# Altium PCB TIDA_010057.PcbDoc (part 3 of 9)
Units mil, origin at the board's own origin, x right, y up, seen from the top; angles counter-clockwise.
Board outline 1771.65 x 3543.31 mil, 12 copper layers (Top Layer, GND1, Signal Layer 1, GND2, POWER1, POWER2, GND4, POWER3, GND6, Signal Layer 2, GND7, Bottom Layer), stack 62.79 mil thick; 593 components, 374 nets, 1805 pads, 1029 vias.
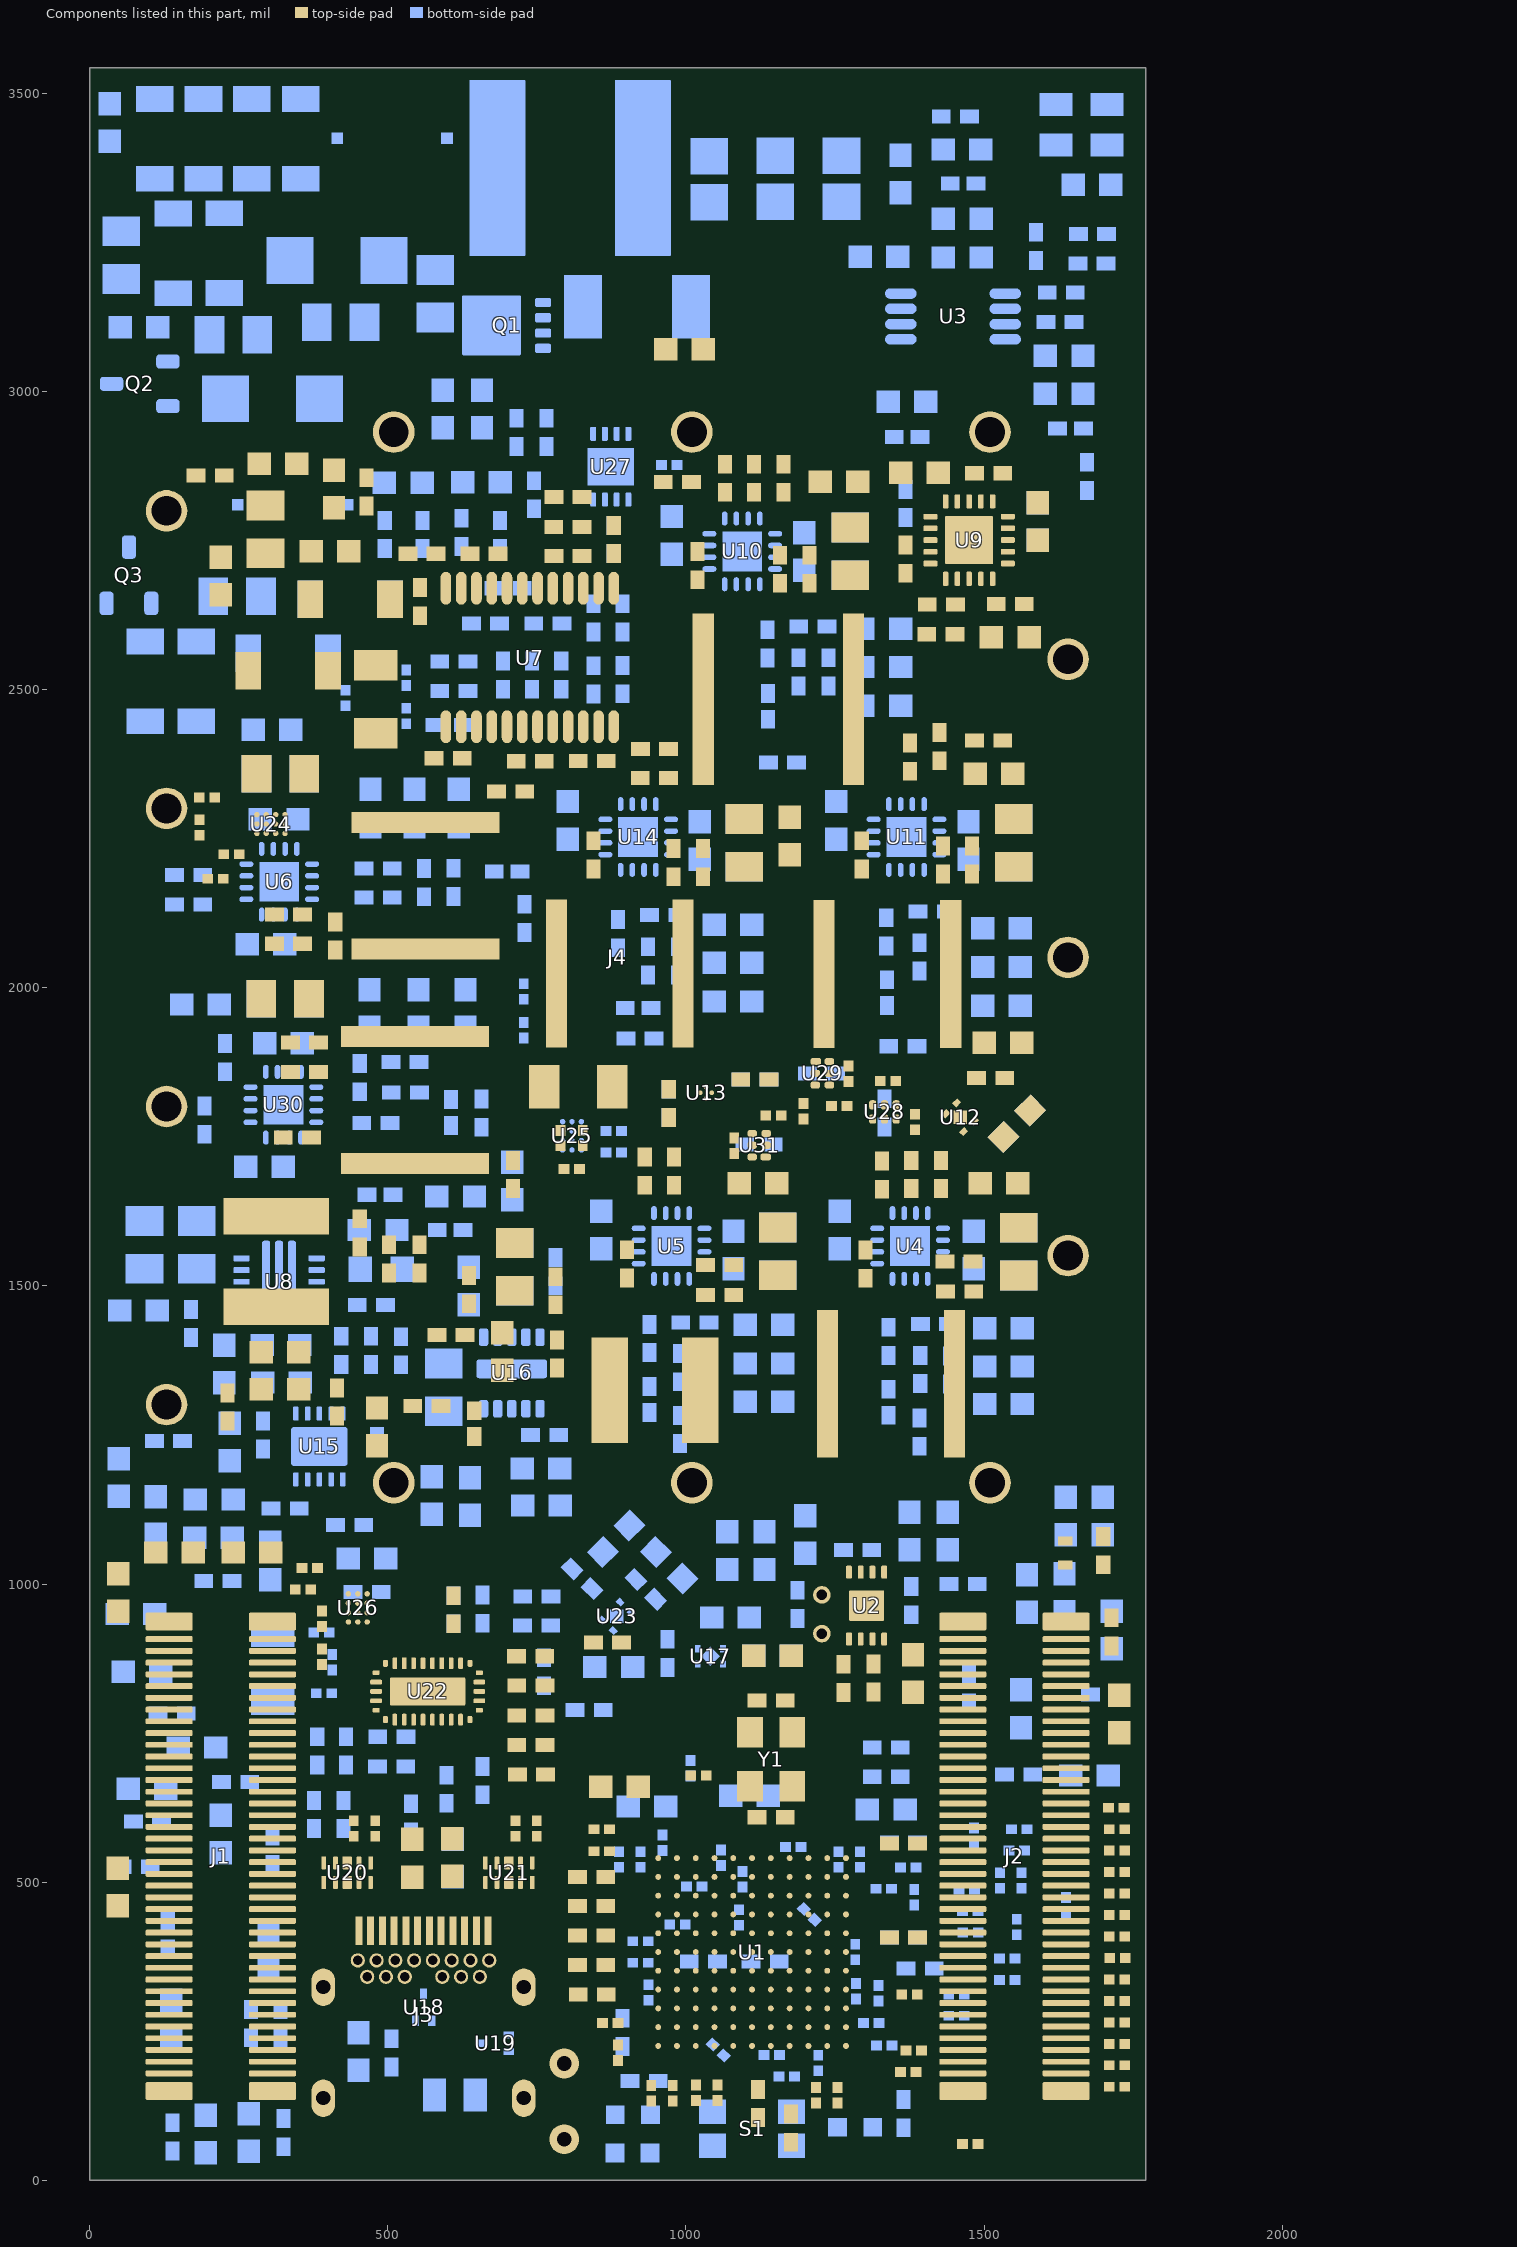
[diagram p12: the components of this part, seen from the top]

## Part data (continued)
C73 C101 C223: "CAP, CERM, 10 µF, 10 V,+/- 20%, X5R, 0402", Cap_Case=0402, Manufacturer="Samsung Electro-Mechanics", Supplier Part Number 1=1276-1450-1-ND, TempCo=X5R, Tolerance_%=20, Value2=10V, ValueDisplayed=10µF, AEC Category=Q200, AEC Qualified=?, Cap_F=0.00001, ComponentLink1Description="Datasheet link", ComponentLink1URL=https://sps06.itg.ti.com/sites/KMS/crossdivteams/altium/docs/ComponentDatasheets/CL05A106MP5NUNC.pdf, CompType=Capacitor, Green_EU RoHS=Passed, Green_EU RoHS-2=Incomplete, Green_Lifecycle=Active, Green_REACh=Passed, LatestRevisionDate=2017-06-22, MountType=SMT, PackageReference=0402, PartNumber=CL05A106MP5NUNC, Polarized=N, Published=2008-06-19, Publisher="Texas Instruments", RoHS=Y, SizeArea_mm2=0.5, SizeAreaWB_mm2=3, SizeX_mm=1, SizeY_mm=0.5, SizeZ_mm=0.6, Supplier 1=Digi-Key, SymbolVersion=2008-07-09, TaMax_C=85, TaMin_C=-55, Technology=Ceramic, U/M=EA, VDC_V=10
C77 C164 C174: "CAP, CERM, 1 µF, 16 V,+/- 10%, X6S, 0402", Cap_Case=0402, Manufacturer=TDK, Supplier Part Number 1=445-9086-1-ND, TempCo=X6S, Tolerance_%=10, Value1="0.011416 ohm", Value2=16V, ValueDisplayed=1µF, AEC Category=Q200, AEC Grade=N/A, AEC Qualified=N, Cap_F=0.000001, ComponentLink1Description="Datasheet link", ComponentLink1URL=https://product.tdk.com/en/search/capacitor/ceramic/mlcc/info?part_no=C1005X6S1C105K050BC, CompType=Capacitor, ESR_Ohm=0.011416, IRMS_A=1.483, LatestRevisionDate=2017-06-22, MountType=SMT, PackageReference=0402, PartNumber=C1005X6S1C105K050BC, Polarized=N, Published=2008-06-19, Publisher="Texas Instruments", RoHS=Y, SizeArea_mm2=0.5, SizeAreaWB_mm2=3, SizeX_mm=1, SizeY_mm=0.5, SizeZ_mm=0.6, Supplier 1=Digi-Key, Supplier 2=Mouser, Supplier Part Number 2=810-C1005X6S1C105K050BC, SymbolVersion=2008-07-09, TaMax_C=105, TaMin_C=-55, Technology=Ceramic, U/M=EA, VDC_V=16
C78: library part CMP-0009745-1, "CAP, CERM, 1000 pF, 16 V, +/- 10%, X7R, 0201", Cap_Case=0201, Manufacturer=MuRata, Supplier Part Number 1=GRM033R71C102KA01D-ND, TempCo=X7R, Tolerance_%=10%, Value1=Unknown, Value2=16V, ValueDisplayed=1000pF, AEC Category=Q200, AEC Qualified=?, Cap_F=1nF, ComponentLink1Description="Datasheet link", ComponentLink1URL=http://search.murata.co.jp/Ceramy/PnsearchViewAction.do?HnOFG=ON&HnNFG=ON&SEL_CNT=50&sLang=en&sKey=GRM033R71C102KA01D&x=9&y=9&search=startwith, CompType=Capacitor, LatestRevisionDate=2017-03-09, MountType=SMT, PackageReference=0201, PartNumber=GRM033R71C102KA01D, Polarized=N, Published=2008-06-19, Publisher="Texas Instruments", RoHS=Y, SizeArea_mm2=0.18, SizeAreaWB_mm2=2.08, SizeX_mm=0.6, SizeY_mm=0.3, SizeZ_mm=0.26, Supplier 1=Digi-Key, Supplier 2=Mouser, Supplier Part Number 2=81-GRM033R71C102KA1D, TaMax_C=125°C, TaMin_C=-55°C, Technology=Ceramic, U/M=EA, VDC_V=16V
C83 C84 C99 C109 C131 C224 C235 C236: "CAP, CERM, 1 µF, 16 V,+/- 10%, X7R, 0603", Cap_Case=0603, Manufacturer="Wurth Elektronik", Supplier Part Number 1=710-885012206052, TempCo=X7R, Tolerance_%=10, Value2=16V, ValueDisplayed=1µF, AEC Category=Q200, AEC Grade=N/A, AEC Qualified=N, Cap_F=0.000001, ComponentLink1Description="Datasheet link", ComponentLink1URL=http://katalog.we-online.de/pbs/datasheet/885012206052.pdf, CompType=Capacitor, Green_EU RoHS=Passed, Green_EU RoHS-2=Incomplete, Green_Lifecycle=Active, Green_REACh=Passed, LatestRevisionDate=2017-06-22, MountType=SMT, PackageReference=0603, PartNumber=885012206052, Polarized=N, Published=2008-06-19, Publisher="Texas Instruments", RoHS=Y, SizeArea_mm2=1.28, SizeAreaWB_mm2=4.68, SizeX_mm=1.6, SizeY_mm=0.8, SizeZ_mm=1, Supplier 1=Mouser, SymbolVersion=2008-07-09, TaMax_C=125, TaMin_C=-55, Technology=Ceramic, U/M=EA, VDC_V=16
C85 C108 C119 C203 C234: "CAP, CERM, 4.7 µF, 10 V,+/- 20%, X5R, 0603", Cap_Case=0603, Manufacturer=MuRata, TempCo=X5R, Tolerance_%=20, Value2=10V, ValueDisplayed=4.7µF, AEC Category=Q200, AEC Grade=N/A, AEC Qualified=N, Cap_F=0.0000047, ComponentLink1Description="Datasheet link", ComponentLink1URL=http://psearch.en.murata.com/capacitor/product/GRM188R61A475MAAJ%23.pdf, CompType=Capacitor, LatestRevisionDate=2017-06-22, MountType=SMT, PackageReference=0603, PartNumber=GRM188R61A475MAAJ, Polarized=N, Published=2008-06-19, Publisher="Texas Instruments", RoHS=Y, SizeArea_mm2=1.28, SizeAreaWB_mm2=4.68, SizeX_mm=1.6, SizeY_mm=0.8, SizeZ_mm=1, SymbolVersion=2008-07-09, TaMax_C=85, TaMin_C=-55, Technology=Ceramic, U/M=EA, VDC_V=10
C100: library part CMP-0006676-2, "CAP, CERM, 1200 pF, 50 V, +/- 10%, X7R, 0402", Cap_Case=0402, Manufacturer=MuRata, Supplier Part Number 1=490-1304-1-ND, TempCo=X7R, Tolerance_%=10%, Value1=Unknown, Value2=50V, ValueDisplayed=1200pF, AEC Category=Q200, AEC Qualified=?, Cap_F=1.2nF, ComponentLink1Description="Datasheet link", ComponentLink1URL=http://search.murata.co.jp/Ceramy/PnsearchViewAction.do?HnOFG=ON&HnNFG=ON&SEL_CNT=50&sLang=en&sKey=GRM155R71H122KA01D&x=9&y=9&search=startwith, CompType=Capacitor, LatestRevisionDate=2017-03-09, MountType=SMT, PackageReference=0402, PartNumber=GRM155R71H122KA01D, Polarized=N, Published=2008-06-19, Publisher="Texas Instruments", RoHS=Y, SizeArea_mm2=0.5, SizeAreaWB_mm2=3, SizeX_mm=1, SizeY_mm=0.5, SizeZ_mm=0.6, Supplier 1=Digi-Key, Supplier 2=Mouser, Supplier Part Number 2=81-GRM15R71H122KA01D, TaMax_C=125°C, TaMin_C=-55°C, Technology=Ceramic, U/M=EA, VDC_V=50V
C107: library part CMP-0006389-2, "CAP, CERM, 470 pF, 25 V, +/- 5%, C0G/NP0, 0402", Cap_Case=0402, Manufacturer=MuRata, Supplier Part Number 1=GRM1555C1E471JA01D-ND, TempCo=C0G/NP0, Tolerance_%=5%, Value1=Unknown, Value2=25V, ValueDisplayed=470pF, AEC Category=Q200, AEC Qualified=?, Cap_F=470pF, ComponentLink1Description="Datasheet link", ComponentLink1URL=http://search.murata.co.jp/Ceramy/PnsearchViewAction.do?HnOFG=ON&HnNFG=ON&SEL_CNT=50&sLang=en&sKey=GRM1555C1E471JA01D&x=9&y=9&search=startwith, CompType=Capacitor, LatestRevisionDate=2017-03-09, MountType=SMT, PackageReference=0402, PartNumber=GRM1555C1E471JA01D, Polarized=N, Published=2008-06-19, Publisher="Texas Instruments", RoHS=Y, SizeArea_mm2=0.5, SizeAreaWB_mm2=3, SizeX_mm=1, SizeY_mm=0.5, SizeZ_mm=0.6, Supplier 1=Digi-Key, Supplier 2=Mouser, Supplier Part Number 2=81-GRM1555C1E471JA1D, TaMax_C=125°C, TaMin_C=-55°C, Technology=Ceramic, U/M=EA, VDC_V=25V
C115: library part CMP-0085848-1, "CAP, CERM, 1 µF, 25 V,+/- 10%, X5R, 0402", Cap_Case=0402, Manufacturer="Samsung Electro-Mechanics", TempCo=X5R, Tolerance_%=10%, Value2=25V, ValueDisplayed=1µF, AEC Category=Q200, AEC Grade=N/A, AEC Qualified=N, Cap_F=1µF, ComponentLink1Description="Datasheet link", ComponentLink1URL=http://www.samsungsem.com/kr/support/product-search/mlcc/__icsFiles/afieldfile/2018/06/19/CL05A105KA5NQNC.pdf, CompType=Capacitor, MountType=SMT, PackageReference=0402, PartNumber=CL05A105KA5NQNC, Polarized=N, RoHS=Y, SizeArea_mm2=0.5, SizeAreaWB_mm2=3, SizeX_mm=1, SizeY_mm=0.5, SizeZ_mm=0.6, TaMax_C=85°C, TaMin_C=-55°C, Technology=Ceramic, U/M=EA, VDC_V=25V
C120 C121 C178 C181 C191 C195 C207: "CAP, CERM, 10 µF, 16 V,+/- 20%, X5R, 0603", Cap_Case=0603, Manufacturer=MuRata, Supplier Part Number 1=GRM188R61C106MAALD-ND, TempCo=X5R, Tolerance_%=20, Value2=16V, ValueDisplayed=10µF, AEC Category=Q200, AEC Qualified=?, Cap_F=0.00001, ComponentLink1Description="Datasheet link", ComponentLink1URL=http://www.murata.com/~/media/webrenewal/support/library/catalog/products/capacitor/mlcc/c02e.ashx, CompType=Capacitor, Green_EU RoHS=Passed, Green_EU RoHS-2=Incomplete, Green_Lifecycle=Active, Green_REACh=Passed, LatestRevisionDate=2017-06-22, MountType=SMT, PackageReference=0603, PartNumber=GRM188R61C106MAALD, Polarized=N, Published=2008-06-19, Publisher="Texas Instruments", RoHS=Y, SizeArea_mm2=1.28, SizeAreaWB_mm2=4.68, SizeX_mm=1.6, SizeY_mm=0.8, SizeZ_mm=1, Supplier 1=Digi-Key, Supplier 2=Mouser, Supplier Part Number 2=81-GRM188R61C106MALD, SymbolVersion=2008-07-09, TaMax_C=85, TaMin_C=-55, Technology=Ceramic, U/M=EA, VDC_V=16
C132 C198: "CAP, CERM, 10 µF, 10 V,+/- 20%, X5R, 0402", Cap_Case=0402, Manufacturer=MuRata, TempCo=X5R, Tolerance_%=20, Value2=10V, ValueDisplayed=10µF, AEC Category=Q200, AEC Qualified=?, Cap_F=0.00001, ComponentLink1Description="Datasheet link", ComponentLink1URL="https://sps06.itg.ti.com/sites/KMS/crossdivteams/altium/docs/ComponentDatasheets/GRM155R61A106ME11 Electrical Characteristics Data.pdf", CompType=Capacitor, LatestRevisionDate=2017-06-22, MountType=SMT, PackageReference=0402, PartNumber=GRM155R61A106ME11, Polarized=N, Published=2008-06-19, Publisher="Texas Instruments", RoHS=Y, SizeArea_mm2=0.5, SizeAreaWB_mm2=3, SizeX_mm=1, SizeY_mm=0.5, SizeZ_mm=0.6, SymbolVersion=2008-07-09, TaMax_C=85, TaMin_C=-55, Technology=Ceramic, U/M=EA, VDC_V=10
C135 C199: "CAP, CERM, 0.1 µF, 16 V,+/- 10%, X5R, 0402", Cap_Case=0402, Manufacturer="Johanson Technology", Supplier Part Number 1=709-1129-1-ND, TempCo=X5R, Tolerance_%=10, Value2=16V, ValueDisplayed=0.1µF, AEC Category=Q200, AEC Grade=N/A, AEC Qualified=N, Cap_F=0.0000001, ComponentLink1Description="Datasheet link", ComponentLink1URL=http://www.johansondielectrics.com/downloads/jdi-product-catalog.pdf, CompType=Capacitor, Green_EU RoHS=Incomplete, Green_EU RoHS-2=Incomplete, Green_Lifecycle="Not Set", Green_REACh=Incomplete, LatestRevisionDate=2017-06-22, MountType=SMT, PackageReference=0402, PartNumber=160R07X104KV4T, Polarized=N, Published=2008-06-19, Publisher="Texas Instruments", RoHS=Y, SizeArea_mm2=0.5, SizeAreaWB_mm2=3, SizeX_mm=1, SizeY_mm=0.5, SizeZ_mm=0.65, Supplier 1=Digi-Key, Supplier 2=Newark, Supplier 3=Mouser, Supplier Part Number 2=45W5808, Supplier Part Number 3=605-160R07X104KV4T, SymbolVersion=2008-07-09, TaMax_C=85, TaMin_C=-55, Technology=Ceramic, U/M=EA, VDC_V=16
C138 C139 C144 C146 C147 C148 C149 C150: "CAP, CERM, 0.01 µF, 6.3 V,+/- 10%, X5R, 0201", Cap_Case=0201, Manufacturer=MuRata, Supplier Part Number 1=490-5403-1-ND, TempCo=X5R, Tolerance_%=10, Value2=6.3V, ValueDisplayed=0.01µF, AEC Category=Q200, AEC Qualified=?, Cap_F=0.00000001, ComponentLink1Description="Datasheet link", ComponentLink1URL=http://search.murata.co.jp/Ceramy/PnsearchViewAction.do?HnOFG=ON&HnNFG=ON&SEL_CNT=50&sLang=en&sKey=GRM033R60J103KA01D&x=9&y=9&search=startwith, CompType=Capacitor, Green_EU RoHS=Passed, Green_EU RoHS-2=Incomplete, Green_Lifecycle=Active, Green_REACh=Passed, LatestRevisionDate=2017-06-22, MountType=SMT, PackageReference=0201, PartNumber=GRM033R60J103KA01D, Polarized=N, Published=2008-06-19, Publisher="Texas Instruments", RoHS=Y, SizeArea_mm2=0.18, SizeAreaWB_mm2=2.08, SizeX_mm=0.6, SizeY_mm=0.3, SizeZ_mm=0.26, Supplier 1=Digi-Key, Supplier 2=Mouser, Supplier Part Number 2=81-GRM033R60J103KA1D, SymbolVersion=2008-07-09, TaMax_C=85, TaMin_C=-55, Technology=Ceramic, U/M=EA, VDC_V=6.3
C179 C190 C192: "CAP, CERM, 0.01 µF, 16 V,+/- 10%, X7R, 0402", Cap_Case=0402, Manufacturer="Wurth Elektronik", Supplier Part Number 1=710-885012205031, TempCo=X7R, Tolerance_%=10, Value2=16V, ValueDisplayed=0.01µF, AEC Category=Q200, AEC Grade=N/A, AEC Qualified=N, Cap_F=0.00000001, ComponentLink1Description="Datasheet link", ComponentLink1URL=http://katalog.we-online.de/pbs/datasheet/885012205031.pdf, CompType=Capacitor, Green_EU RoHS=Passed, Green_EU RoHS-2=Incomplete, Green_Lifecycle=Active, Green_REACh=Passed, LatestRevisionDate=2017-06-22, MountType=SMT, PackageReference=0402, PartNumber=885012205031, Polarized=N, Published=2008-06-19, Publisher="Texas Instruments", RoHS=Y, SizeArea_mm2=0.5, SizeAreaWB_mm2=3, SizeX_mm=1, SizeY_mm=0.5, SizeZ_mm=0.6, Supplier 1=Mouser, SymbolVersion=2008-07-09, TaMax_C=125, TaMin_C=-55, Technology=Ceramic, U/M=EA, VDC_V=16
C184: library part CMP-0085569-1, "CAP, CERM, 0.033 µF, 16 V,+/- 10%, X5R, 0402", Cap_Case=0402, Manufacturer=AVX, TempCo=X5R, Tolerance_%=10%, Value2=16V, ValueDisplayed=0.033µF, AEC Category=Q200, AEC Grade=N/A, AEC Qualified=N, Cap_F=33nF, ComponentLink1Description="Datasheet link", ComponentLink1URL=http://datasheets.avx.com/cx5r.pdf, CompType=Capacitor, MountType=SMT, PackageReference=0402, PartNumber=0402YD333KAT2A, Polarized=N, RoHS=Y, SizeArea_mm2=0.5, SizeAreaWB_mm2=3, SizeX_mm=1, SizeY_mm=0.5, SizeZ_mm=0.6, TaMax_C=85°C, TaMin_C=-55°C, Technology=Ceramic, U/M=EA, VDC_V=16V
C187 C193: "CAP, CERM, 10 µF, 10 V,+/- 10%, X7R, 0805", Cap_Case=0805, Manufacturer="Wurth Elektronik", Supplier Part Number 1=710-885012207026, TempCo=X7R, Tolerance_%=10, Value2=10V, ValueDisplayed=10µF, AEC Category=Q200, AEC Grade=N/A, AEC Qualified=N, Cap_F=0.00001, ComponentLink1Description="Datasheet link", ComponentLink1URL=http://katalog.we-online.de/pbs/datasheet/885012207026.pdf, CompType=Capacitor, LatestRevisionDate=2017-06-22, MountType=SMT, PackageReference=0805, PartNumber=885012207026, Polarized=N, Published=2008-06-19, Publisher="Texas Instruments", RoHS=Y, SizeArea_mm2=2.5, SizeAreaWB_mm2=6.75, SizeX_mm=2, SizeY_mm=1.25, SizeZ_mm=1.45, Supplier 1=Mouser, SymbolVersion=2008-07-09, TaMax_C=125, TaMin_C=-55, Technology=Ceramic, U/M=EA, VDC_V=10
C194: "CAP, CERM, 33 µF, 10 V,+/- 20%, X5R, 0805", Cap_Case=0805, Manufacturer=TDK, Supplier Part Number 1=445-8238-1-ND, TempCo=X5R, Tolerance_%=20, Value1="0.001694 ohm", Value2=10V, ValueDisplayed=33µF, AEC Category=Q200, AEC Grade=N/A, AEC Qualified=N, Cap_F=0.000033, ComponentLink1Description="Datasheet link", ComponentLink1URL=https://product.tdk.com/en/search/capacitor/ceramic/mlcc/info?part_no=C2012X5R1A336M125AC, CompType=Capacitor, ESR_Ohm=0.001694, Green_EU RoHS=Passed, Green_EU RoHS-2=Passed, Green_Lifecycle=Active, Green_REACh=Passed, IRMS_A=5.01281, LatestRevisionDate=2017-06-22, MountType=SMT, PackageReference=0805, PartNumber=C2012X5R1A336M125AC, Polarized=N, Published=2008-06-19, Publisher="Texas Instruments", RoHS=Y, SizeArea_mm2=2.5, SizeAreaWB_mm2=6.75, SizeX_mm=2, SizeY_mm=1.25, SizeZ_mm=1.45, Supplier 1=Digi-Key, Supplier 2=Newark, Supplier Part Number 2=65T7800, SymbolVersion=2008-07-09, TaMax_C=85, TaMin_C=-55, Technology=Ceramic, U/M=EA, VDC_V=10
C206 C243: "CAP, CERM, 0.22 µF, 16 V,+/- 10%, X7R, 0603", Cap_Case=0603, Manufacturer="Wurth Elektronik", Supplier Part Number 1=710-885012206048, TempCo=X7R, Tolerance_%=10, Value2=16V, ValueDisplayed=0.22µF, AEC Category=Q200, AEC Grade=N/A, AEC Qualified=N, Cap_F=0.00000022, ComponentLink1Description="Datasheet link", ComponentLink1URL=http://katalog.we-online.de/pbs/datasheet/885012206048.pdf, CompType=Capacitor, LatestRevisionDate=2017-06-22, MountType=SMT, PackageReference=0603, PartNumber=885012206048, Polarized=N, Published=2008-06-19, Publisher="Texas Instruments", RoHS=Y, SizeArea_mm2=1.28, SizeAreaWB_mm2=4.68, SizeX_mm=1.6, SizeY_mm=0.8, SizeZ_mm=1, Supplier 1=Mouser, SymbolVersion=2008-07-09, TaMax_C=125, TaMin_C=-55, Technology=Ceramic, U/M=EA, VDC_V=16
C222: library part CMP-0006680-2, "CAP, CERM, 1800 pF, 50 V, +/- 10%, X7R, 0402", Cap_Case=0402, Manufacturer=MuRata, Supplier Part Number 1=490-3246-1-ND, TempCo=X7R, Tolerance_%=10%, Value1=Unknown, Value2=50V, ValueDisplayed=1800pF, AEC Category=Q200, AEC Qualified=?, Cap_F=1.8nF, ComponentLink1Description="Datasheet link", ComponentLink1URL=http://search.murata.co.jp/Ceramy/PnsearchViewAction.do?HnOFG=ON&HnNFG=ON&SEL_CNT=50&sLang=en&sKey=GRM155R71H182KA01D&x=9&y=9&search=startwith, CompType=Capacitor, LatestRevisionDate=2017-03-09, MountType=SMT, PackageReference=0402, PartNumber=GRM155R71H182KA01D, Polarized=N, Published=2008-06-19, Publisher="Texas Instruments", RoHS=Y, SizeArea_mm2=0.5, SizeAreaWB_mm2=3, SizeX_mm=1, SizeY_mm=0.5, SizeZ_mm=0.6, Supplier 1=Digi-Key, Supplier 2=Mouser, Supplier Part Number 2=81-GRM155R71H182KA1D, TaMax_C=125°C, TaMin_C=-55°C, Technology=Ceramic, U/M=EA, VDC_V=50V
D1 D2 D9: library part CMP-0003041-3, "LED, Amber, SMD", Color=Amber, Manufacturer=Avago, Power_TotalModule=60mW, Value1=0.06W, Value2=1.9V, Angle=170, ComponentLink1Description="Datasheet link", ComponentLink1URL=http://www.avagotech.com/docs/AV02-0112EN, CompType=LED, Io_A=20mA, Ir_A=100µA, MountType=SMT, PackageReference=1.6x0.8mm, PartNumber=HSMA-C190, RoHS=Y, SizeArea_mm2=1.28, SizeAreaWB_mm2=4.68, SizeX_mm=1.6, SizeY_mm=0.8, SizeZ_mm=0.9, TJmax_C=95°C, Type=AlInGaP, Vf_V=1.9V, Vr_V=5V
D3 D6: "Diode, Schottky, 150 V, 1 A, SMA", Manufacturer=STMicroelectronics, Supplier Part Number 1=497-7545-1-ND, Value1=1A, Value2=0.78V, AEC Category=Q101, AEC Qualified=N, ComponentLink1Description="Datasheet link", ComponentLink1URL=http://www.st.com/web/en/resource/technical/document/datasheet/CD00003321.pdf, CompType=Diode, Green_EU RoHS=Incomplete, Green_EU RoHS-2=Incomplete, Green_Lifecycle="Not Set", Green_REACh=Incomplete, Io_A=1, LatestRevisionDate=2017-06-26, MountType=SMT, PackageReference=SMA, PartNumber=STPS1150A, Published=2008-06-26, Publisher="Texas Instruments", RJC_CperW=30, RoHS=Y, SizeArea_mm2=16.3228, SizeAreaWB_mm2=37.3428, SizeX_mm=5.59, SizeY_mm=2.92, SizeZ_mm=2.87, Supplier 1=Digi-Key, Supplier 2=Newark, Supplier 3=Mouser, Supplier Part Number 2=57P1608, Supplier Part Number 3=511-STPS1150A, SymbolVersion=2008-12-08, TJmax_C=175, Type=Schottky, U/M=EA, Vf_V=0.78, Vr_V=150
D4 D5 D7 D8 D10 D11 D12 D13 D14 D15 D16 D17 D18: "Diode, Switching, 75 V, 0.3 A, SOD-523", Manufacturer="Micro Commercial Components", Supplier Part Number 1=1N4148XTPMSCT-ND, Value1=0.3A, Value2=1.25V, AEC Category=Q101, AEC Qualified=?, ComponentLink1Description="Datasheet link", ComponentLink1URL=http://www.mccsemi.com/up_pdf/1N4148X(SOD-523).PDF, CompType=Diode, Green_EU RoHS=Incomplete, Green_EU RoHS-2=Incomplete, Green_Lifecycle="Not Set", Green_REACh=Incomplete, Io_A=0.3, LatestRevisionDate=2017-06-26, MountType=SMT, PackageReference=SOD-523, PartNumber=1N4148X-TP, Published=2008-06-26, Publisher="Texas Instruments", RoHS=Y, SizeArea_mm2=1.53, SizeAreaWB_mm2=5.13, SizeX_mm=1.7, SizeY_mm=0.9, SizeZ_mm=0.65, Supplier 1=Digi-Key, Supplier 2=Newark, Supplier 3=Mouser, Supplier Part Number 2=69R6666, Supplier Part Number 3=833-1N4148X-TP, SymbolVersion=2008-12-08, TJmax_C=150, Type=Switching, U/M=EA, Vf_V=1.25, Vr_V=75
GND VBUS: "TEST POINT.  No entry in BOM.", CompType=Testpoint, LatestRevisionDate=2017-05-31, LatestRevisionNote="Added Alternate PartNumber and Alternate Manufacturer parameters to appropriate components.", PackageReference=N/A, Publisher="Texas Instruments", SymbolVersion=2010-10-20
J1 J2: library part CMP-0084862-1, "Receptacle, 0.5mm, 40x2, Gold, SMD", Color=White, Manufacturer=Panasonic, ComponentLink1Description="Datasheet URL", ComponentLink1URL=https://www3.panasonic.biz/ac/e_download/control/connector/base-base/catalog/con_eng_p5k.pdf, CompType="Socket Strip", ContactFinish=Gold, Gender=Female, MountType=SMT, Orientation=Vertical, PackageReference="Receptacle, 0.5mm, 40x2, SMD", PartNumber=AXK5S80347YG, PinCount=80, Pitch_mm=0.5, RoHS=Y, Row_Count=2, RowSpacing_mm=4.4
J3: library part CMP-0080891-1, "Connector, Receptacle, USB Type C, R/A", Color=Black, Current_A=3A, Manufacturer="Wurth Elektronik", Supplier Part Number 1=732-9618-1-ND, Voltage_V=5V, Cert_UL=Y, ComponentLink1Description="Datasheet URL", ComponentLink1URL=http://katalog.we-online.de/em/datasheet/632723x00011.pdf, CompType=USB, ContactFinish=Gold, Gender=Female, MountType=SMT, Orientation=R/A, PackageReference="Connector, Receptacle, USB Type C, R/A, THT/SMT", PartNumber=632723300011, PinCount=24, RoHS=Y, Supplier 1=Digi-Key, Supplier 2=Mouser, Supplier Part Number 2=710-632723300011
J4: "SHIELD, 13 POS, THRU", Manufacturer="LEADER TECH", ComponentLink1Description="Datasheet Link", CompType=SHIELD, MountType=TH, PartNumber=CBS1.50X1.75, RoHS=TBD, SymbolCreator=x0199378, SymbolVersion=201-02-01
L1: library part CMP-0086317-1, "Inductor, Shielded, Ferrite, 100 µH, 1.2 A, 0.377 ohm, SMD", Manufacturer="Wurth Elektronik", Value1="0.377 ohm", Value2=1.2A, ValueDisplayed=100µH, AEC Category=Q200, AEC Grade=N/A, AEC Qualified=N, ComponentLink1Description="Datasheet link", ComponentLink1URL=https://katalog.we-online.de/pbs/datasheet/74404084101.pdf, CompType=Inductor, DCR_ohm=0.377, Imax_A=1.2A, Ind_H=100µH, Irms="1.2A @ 40C rise", Isat="1.5A @ 20% inductance drop", Material=Ferrite, MountType=SMT, PackageReference=8x8mm, PartNumber=74404084101, RoHS=Y, SizeArea_mm2=64, SizeAreaWB_mm2=100, SizeX_mm=8, SizeY_mm=8, SizeZ_mm=4.2, Technology=Shielded
L2 L5: library part CMP-0062218-1, "Inductor, Drum Core, Ferrite, 10 uH, 0.85 A, 0.332 ohm, SMD", Manufacturer=Sumida, Supplier Part Number 1=CDH3D13SHPNP-100MC-ND, Value1="0.332 ohm", Value2=0.85A, ValueDisplayed=10uH, AEC Category=Q200, AEC Qualified=?, ComponentLink1Description="Datasheet link", ComponentLink1URL=http://www.sumida.com/products/pdf/CDH3D13DSHP.pdf, CompType=Inductor, DCR_ohm=3.32d, Green_EU RoHS=Incomplete, Green_EU RoHS-2=Incomplete, Green_Lifecycle="Not Set", Green_REACh=Incomplete, Imax_A=8.5dA, Ind_H=10µH, Irms="0.9A @ 40C rise", Isat="0.85A @ 20% inductance drop", LatestRevisionDate=2017-06-02, Material=Ferrite, MountType=SMT, PackageReference="3 x 1.45 x 3mm", PartNumber=CDH3D13SHPNP-100MC, Published=2008-06-26, Publisher="Texas Instruments", RoHS=Y, Supplier 1=Digi-Key, Supplier 2=Mouser, Supplier Part Number 2=851-CDH3D13HPNP100MC, Technology="Drum Core"
L3 L4: library part CMP-0064699-2, "Inductor, Shielded Drum Core, Metal Composite, 1mH, 0.08 A, 5.4 ohm, SMD", Manufacturer="Wurth Elektronik", Supplier Part Number 1=732-3662-1-ND, Value1="5.4 ohm", Value2=0.08A, ValueDisplayed=1mH, AEC Category=Q200, AEC Qualified=?, ComponentLink1Description="Datasheet link", ComponentLink1URL=https://katalog.we-online.de/pbs/datasheet/744043102.pdf, CompType=Inductor, DCR_ohm=5.4, Green_EU RoHS=Passed, Green_EU RoHS-2=Incomplete, Green_Lifecycle=Active, Green_REACh=Passed, Imax_A=0.08A, Ind_H=470µH, Irms="0.14A @ 30C rise", Isat="0.08A @ 35% inductance drop", LatestRevisionDate=2017-06-02, Material="Metal Composite", MountType=SMT, PackageReference=WE-TPC-M2, PartNumber=744043102, Published=2008-06-26, Publisher="Texas Instruments", RoHS=Y, SizeArea_mm2=23.04, SizeAreaWB_mm2=33.64, SizeX_mm=4.8, SizeY_mm=4.8, SizeZ_mm=3, Supplier 1=Digi-Key, Technology="Shielded Drum Core"
L6 L11 L24 L25 L27: library part 744053330, "SMT Shielded Tiny Power Inductor WE-TPC, size 5828, 33 uH, 0.9 A", DC Resistance max.="190 mOhm", Inductance="33 uH", Operating Temperature="-40 to +125 degC", Rated Current="0.9 A", Saturation Current="0.75 A", Self Resonant Frequency="15 MHz", ComponentLink1Description=Manufacturer, ComponentLink1URL=http://www.we-online.de, ComponentLink2Description=Datasheet, ComponentLink2URL=https://katalog.we-online.com/pbs/datasheet/744053330.pdf, Mounting Technology=SMT, Packaging="Tape and Reel", Part Number=744053330, Published Date="December 2018", Publisher="Wurth Elektronik", Size=5828
L7 L8 L12 L14 L15 L16 L18 L20 L21 L22 L26 L28 L29 L30 L31 L32 L33 L34 L35 L36 L37 L38 L39 L40 L41 L42 L43 L44: "Ferrite Bead, 30 ohm @ 100 MHz, 3 A, 0603", Manufacturer="Wurth Elektronik", Supplier Part Number 1=732-1591-1-ND, Value1="0.04 ohm", Value2=3A, ValueDisplayed="30 ohm", ComponentLink1Description="Datasheet link", ComponentLink1URL=http://katalog.we-online.de/pbs/datasheet/742792609.pdf, CompType="Ferrite Bead", DCR_ohm=0.04, Green_EU RoHS=Passed, Green_EU RoHS-2=Incomplete, Green_Lifecycle=Active, Green_REACh=Passed, Imax_A=3, LatestRevisionDate=2017-06-22, MountType=SMT, PackageReference=0603, PartNumber=742792609, Published=2014-04-30, Publisher="Texas Instruments", RoHS=Y, SizeArea_mm2=1.28, SizeAreaWB_mm2=4.68, SizeX_mm=1.6, SizeY_mm=0.8, SizeZ_mm=1, Supplier 1=Digi-Key, Supplier 2=Mouser, Supplier Part Number 2=710-742792609, SymbolVersion=2017-01-06, Ztyp@1GHz_Ohm=40.472, ZTyp@100MHz_Ohm=30
L9 L10 L23: "Ferrite Bead, 600 ohm @ 100 MHz, 1 A, 0603", Manufacturer="Wurth Elektronik", Supplier Part Number 1=732-6703-1-ND, Value1="0.2 ohm", Value2=1A, ValueDisplayed="600 ohm", ComponentLink1Description="Datasheet link", ComponentLink1URL=http://katalog.we-online.de/pbs/datasheet/782633601.pdf, CompType="Ferrite Bead", DCR_ohm=0.2, Green_EU RoHS=Passed, Green_EU RoHS-2=Incomplete, Green_Lifecycle=Active, Green_REACh=Passed, Imax_A=1, LatestRevisionDate=2017-06-22, MountType=SMT, PackageReference=0603, PartNumber=782633601, Published=2014-04-30, Publisher="Texas Instruments", RoHS=Y, SizeArea_mm2=1.28, SizeAreaWB_mm2=4.68, SizeX_mm=1.6, SizeY_mm=0.8, SizeZ_mm=1, Supplier 1=Digi-Key, SymbolVersion=2017-01-06, Ztyp@1GHz_Ohm=228.849, ZTyp@100MHz_Ohm=600
L13: library part 744062002, "SMT Shielded Tiny Power Inductor WE-TPC, size 6823, 2.2 uH, 3.4 A", DC Resistance max.="24 mOhm", Inductance="2.2 uH", Operating Temperature="-40 to +125 degC", Rated Current="3.4 A", Saturation Current="2.7 A", Self Resonant Frequency="70 MHz", ComponentLink1Description=Manufacturer, ComponentLink1URL=http://www.we-online.de, ComponentLink2Description=Datasheet, ComponentLink2URL=https://katalog.we-online.com/pbs/datasheet/744062002.pdf, Mounting Technology=SMT, Packaging="Tape and Reel", Part Number=744062002, Published Date="December 2018", Publisher="Wurth Elektronik", Size=6823
L17: library part 74404054068, "SMT Semi-Shielded Power Inductor WE-LQS, size 5040, 6.8 uH, 2.5 A", DC Resistance max.="51.6 mOhm", Inductance="6.8 uH", Operating Temperature="-40 to +125 degC", Rated Current="2.5 A", Saturation Current="3.2 A", Self Resonant Frequency="35 MHz", ComponentLink1Description=Manufacturer, ComponentLink1URL=http://www.we-online.de, ComponentLink2Description=Datasheet, ComponentLink2URL=https://katalog.we-online.de/pbs/datasheet/74404054068.pdf, Mounting Technology=SMT, Packaging="Tape and Reel", Part Number=74404054068, Published Date="November 2018", Publisher="Wurth Elektronik", Size=5040
L19: library part 74404054150, "SMT Semi-Shielded Power Inductor WE-LQS, size 5040, 15 uH, 2 A", DC Resistance max.="103.2 mOhm", Inductance="15 uH", Operating Temperature="-40 to +125 degC", Rated Current="2 A", Saturation Current="2.2 A", Self Resonant Frequency="22 MHz", ComponentLink1Description=Manufacturer, ComponentLink1URL=http://www.we-online.de, ComponentLink2Description=Datasheet, ComponentLink2URL=https://katalog.we-online.de/pbs/datasheet/74404054150.pdf, Mounting Technology=SMT, Packaging="Tape and Reel", Part Number=74404054150, Published Date="November 2018", Publisher="Wurth Elektronik", Size=5040
Logo1: library part CMP-0074769-1, Lib Reference="WEEE logo", PartNumber="WEEE logo"
Logo2: library part Pb-Free, LatestRevisionDate=2016-03-21, Published=2009-03-03, Publisher="Texas Instruments", SymbolCreator=a0412235, SymbolVersion=2011-08-22
Logo3: library part FCC_disclaimer, "FCC_disclaimer", LatestRevisionDate=2016-03-21, Published=2009-03-03, Publisher="Texas Instruments", SymbolCreator=a0412235, SymbolVersion=2016-03-21
Logo5: library part TI_Logo, "Texas Instrument Corporate Signature", ClassName=Logo, LatestRevisionDate=2016-03-21, Published=2009-03-03, Publisher="Texas Instruments", SymbolCreator=a0412235, SymbolVersion=2011-08-22
LOGO6: library part IEC_HighVoltage, "IEC 61010-1 High Voltage Warning", LatestRevisionDate=2016-03-21, Published=2009-03-03, Publisher="Texas Instruments", SymbolCreator=a0412235, SymbolVersion=2011-08-22
Logo10: library part ESD_Susceptible, "ESD Susceptible Symbol", LatestRevisionDate=2016-03-21, Published=2009-03-03, Publisher="Texas Instruments", SymbolCreator=a0412235, SymbolVersion=2011-08-22
Q1: library part CMP-0000969-3, "MOSFET, N-CH, 100 V, 5 A, DNH0008A (VSONP-8)", Alternate Manufacturer=None, Manufacturer="Texas Instruments", Value2="7.2 nC", AEC Category=Q101, AEC Qualified=N, ChMode=Enhancement, ChType=N, ComponentLink1Description="Datasheet link", ComponentLink1URL=http://www.ti.com/lit/ds/symlink/csd19538q3a.pdf, CompType=MOSFET, IdsMax_A=5A, MountType=SMT, PackageReference=DNH0008A, PartNumber=CSD19538Q3A, QgTyp_nC=7.2, RoHS=Y, SizeArea_mm2=10.89, SizeAreaWB_mm2=18.49, SizeX_mm=3.3, SizeY_mm=3.3, SizeZ_mm=0.9, VdsMax_V=100V, Vgs_V=20V
Q2: library part CMP-0074710-1, "Transistor, NPN, 150 V, 1 A, AEC-Q101, SOT-23", Manufacturer="Diodes Inc.", Supplier Part Number 1=FMMT495CT-ND, Value1="1 A", Value2=300.0, AEC Category=Q101, AEC Qualified=Y, ComponentLink1Description="Datasheet link", ComponentLink1URL=https://www.diodes.com/assets/Datasheets/FMMT495.pdf, CompType=BJT, HfeMax=300.0, IcRated_A=1A, LatestRevisionDate=2017-06-26, MountType=SMT, NPN=1.0, PackageReference=SOT-23, PartNumber=FMMT495TA, PNP=0.0, Published=2008-07-31, Publisher="Texas Instruments", RoHS=Y, SizeArea_mm2=7.5, SizeAreaWB_mm2=14.0, SizeX_mm=2.5, SizeY_mm=3.0, SizeZ_mm=1.1, Supplier 1=Digi-Key, Supplier 2=Mouser, Supplier Part Number 2=522-FMMT495TA, TaMax_C=150°C, TaMin_C=-55°C, U/M=EA, Vceo_V=150V, Vcesat1_V=3dV
Q3: library part CMP-0000370-2, "Transistor, PNP, 200 V, 0.3 A, SOT-23", Manufacturer="Diodes Inc.", Supplier Part Number 1=FMMT596CT-ND, Value1="0.3 A", Value2=300, AEC Category=Q101, AEC Qualified=N, ComponentLink1Description="Datasheet link", ComponentLink1URL=http://www.diodes.com/_files/datasheets/FMMT596.pdf, CompType=BJT, HfeMax=300, IcRated_A=3dA, LatestRevisionDate=2017-03-09, MountType=SMT, NPN=0, PackageReference=SOT-23, PartNumber=FMMT596TA, PNP=1, Published=2008-07-31, Publisher="Texas Instruments", RoHS=Y, SizeArea_mm2=7.5, SizeAreaWB_mm2=14, SizeX_mm=2.5, SizeY_mm=3, SizeZ_mm=1.1, Supplier 1=Digi-Key, Supplier 2=Mouser, Supplier Part Number 2=522-FMMT596TA, TaMax_C=150°C, TaMin_C=-55°C, U/M=EA, Vceo_V=200V, Vcesat1_V=2dV
R1 R2 R3 R4 R5 R77 R78 R162: "RES, 10.0 k, 1%, 0.1 W, 0402", Manufacturer=Panasonic, Power_W=0.1, Supplier Part Number 1=P10.0KLCT-ND, TempCo="100 ppm/C", Tolerance_%=1, Value1=1%, Value2=0.1W, Value_Code=10k0, ValueDisplayed=10.0k, AEC Category=Q200, AEC Qualified=?, ComponentLink1Description="Datasheet link", ComponentLink1URL=http://industrial.panasonic.com/www-data/pdf/AOA0000/AOA0000CE2.pdf, CompType=Resistor, EIA_Code=E96, Green_EU RoHS="Passed with Exemption", Green_EU RoHS-2=Passed, Green_Lifecycle=Active, Green_REACh=Passed, LatestRevisionDate=2017-06-12, MountType=SMT, PackageReference=0402, PartNumber=ERJ-2RKF1002X, Published=2008-06-26, Publisher="Texas Instruments", Res_ohm=10000, RoHS=Y, SizeArea_mm2=0.5, SizeX_mm=1, SizeY_mm=0.5, SizeZ_mm=0.6, Supplier 1=Digi-Key, Supplier 2=Newark, Supplier 3=Mouser, Supplier Part Number 2=90W2949, Supplier Part Number 3=667-ERJ-2RKF1002X, SymbolVersion=2009-05-29, Technology="Thick Film", U/M=EA, VDC_V=50
R6 R8 R10 R11 R40 R170 R176 R177 R178 R182: "RES, 4.70 k, 1%, 0.1 W, 0402", Manufacturer=Panasonic, Power_W=0.1, Supplier Part Number 1=P4.70KLCT-ND, TempCo="100 ppm/C", Tolerance_%=1, Value1=1%, Value2=0.1W, Value_Code=4k70, ValueDisplayed=4.70k, AEC Category=Q200, AEC Qualified=?, ComponentLink1Description="Datasheet link", ComponentLink1URL=http://industrial.panasonic.com/www-data/pdf/AOA0000/AOA0000CE2.pdf, CompType=Resistor, Green_EU RoHS="Passed with Exemption", Green_EU RoHS-2=Passed, Green_Lifecycle=Active, Green_REACh=Passed, LatestRevisionDate=2017-06-12, MountType=SMT, PackageReference=0402, PartNumber=ERJ-2RKF4701X, Published=2008-06-26, Publisher="Texas Instruments", Res_ohm=4700, RoHS=Y, SizeArea_mm2=0.5, SizeX_mm=1, SizeY_mm=0.5, SizeZ_mm=0.6, Supplier 1=Digi-Key, Supplier 2=Newark, Supplier 3=Mouser, Supplier Part Number 2=64R5288, Supplier Part Number 3=667-ERJ-2RKF4701X, SymbolVersion=2009-05-29, Technology="Thick Film", U/M=EA, VDC_V=50
R7: "RES, 6.04 k, 1%, 0.063 W, 0402", Manufacturer=Vishay-Dale, Power_W=0.063, Supplier Part Number 1=541-6.04KLCT-ND, TempCo="100 ppm/C", Tolerance_%=1, Value1=1%, Value2=0.063W, Value_Code=6k04, ValueDisplayed=6.04k, AEC Category=Q200, AEC Qualified=?, ComponentLink1Description="Datasheet link", ComponentLink1URL=http://www.vishay.com/docs/20035/dcrcwe3.pdf, CompType=Resistor, EIA_Code=E96, Green_EU RoHS="Passed with Exemption", Green_EU RoHS-2=Passed, Green_Lifecycle=Active, Green_REACh=Passed, LatestRevisionDate=2017-06-12, MountType=SMT, PackageReference=0402, PartNumber=CRCW04026K04FKED, Published=2008-06-26, Publisher="Texas Instruments", Res_ohm=6040, RoHS=Y, SizeArea_mm2=0.5, SizeX_mm=1, SizeY_mm=0.5, SizeZ_mm=0.6, Supplier 1=Digi-Key, Supplier 2=Newark, Supplier 3=Mouser, Supplier Part Number 2=52K7180, Supplier Part Number 3=71-CRCW0402-6.04K-E3, SymbolVersion=2009-05-29, Technology="Thick Film", U/M=EA, VDC_V=50
R9 R38: "RES, 200, 1%, 0.1 W, 0603", Manufacturer=Vishay-Dale, Power_W=0.1, Supplier Part Number 1=541-200HCT-ND, TempCo="100 ppm/C", Tolerance_%=1, Value1=1%, Value2=0.1W, Value_Code=200R, ValueDisplayed=200, AEC Category=Q200, AEC Qualified=?, ComponentLink1Description="Datasheet link", ComponentLink1URL=http://www.vishay.com/docs/20035/dcrcwe3.pdf, CompType=Resistor, EIA_Code=E96, Green_EU RoHS="Passed with Exemption", Green_EU RoHS-2=Passed, Green_Lifecycle=Active, Green_REACh=Passed, LatestRevisionDate=2017-06-13, MountType=SMT, PackageReference=0603, PartNumber=CRCW0603200RFKEA, Published=2008-06-26, Publisher="Texas Instruments", Res_ohm=200, RoHS=Y, SizeArea_mm2=1.28, SizeX_mm=1.6, SizeY_mm=0.8, SizeZ_mm=1, Supplier 1=Digi-Key, Supplier 2=Newark, Supplier 3=Mouser, Supplier Part Number 2=52K8273, Supplier Part Number 3=71-CRCW0603-200-E3, SymbolVersion=2009-05-29, Technology="Thick Film", U/M=EA, VDC_V=75
R12 R13: "RES, 2.20 k, 1%, 0.1 W, 0402", Manufacturer=Panasonic, Power_W=0.1, Supplier Part Number 1=P2.20KLCT-ND, TempCo="100 ppm/C", Tolerance_%=1, Value1=1%, Value2=0.1W, Value_Code=2k20, ValueDisplayed=2.20k, AEC Category=Q200, AEC Qualified=?, ComponentLink1Description="Datasheet link", ComponentLink1URL=http://industrial.panasonic.com/www-data/pdf/AOA0000/AOA0000CE2.pdf, CompType=Resistor, Green_EU RoHS="Passed with Exemption", Green_EU RoHS-2=Passed, Green_Lifecycle=Active, Green_REACh=Passed, LatestRevisionDate=2017-06-12, MountType=SMT, PackageReference=0402, PartNumber=ERJ-2RKF2201X, Published=2008-06-26, Publisher="Texas Instruments", Res_ohm=2200, RoHS=Y, SizeArea_mm2=0.5, SizeX_mm=1, SizeY_mm=0.5, SizeZ_mm=0.6, Supplier 1=Digi-Key, Supplier 2=Newark, Supplier 3=Mouser, Supplier Part Number 2=64R5268, Supplier Part Number 3=667-ERJ-2RKF2201X, SymbolVersion=2009-05-29, Technology="Thick Film", U/M=EA, VDC_V=50
R14 R26 R43: "RES, 330, 1%, 0.1 W, AEC-Q200 Grade 0, 0402", Manufacturer=Panasonic, Power_W=0.1, Supplier Part Number 1=P330LCT-ND, TempCo="100 ppm/C", Tolerance_%=1, Value1=1%, Value2=0.1W, Value_Code=330R, ValueDisplayed=330, AEC Category=Q200, AEC Grade=0, AEC Qualified=Y, ComponentLink1Description="Datasheet link", ComponentLink1URL=http://industrial.panasonic.com/lecs/www-data/pdf/AOA0000/AOA0000CE2.pdf, CompType=Resistor, Green_EU RoHS="Passed with Exemption", Green_EU RoHS-2=Incomplete, Green_Lifecycle=Active, Green_REACh=Passed, LatestRevisionDate=2017-06-12, MountType=SMT, PackageReference=0402, PartNumber=ERJ-2RKF3300X, Published=2008-06-26, Publisher="Texas Instruments", Res_ohm=330, RoHS=Y, SizeArea_mm2=0.5, SizeX_mm=1, SizeY_mm=0.5, SizeZ_mm=0.6, Supplier 1=Digi-Key, Supplier 2=Newark, Supplier 3=Farnell, Supplier Part Number 2=64R5277, Supplier Part Number 3=2397127, SymbolVersion=2009-05-29, Technology="Thick Film", U/M=EA, VDC_V=50
R15 R16 R17 R24 R25 R47 R48 R55 R63 R64 R67 R68 R69 R70 R73 R75 R79 R80 R81 R92 R94 R99 R109 R110 R113 R120 R127 R135 R136 R146 R147 R154 R157 R158 R165 R171 R173 R180 R181 R188 R191 R242 R245 R246 R247: "RES, 0, 5%, 0.063 W, 0402", Manufacturer=Panasonic, Power_W=0.063, Supplier Part Number 1=P0.0JCT-ND, TempCo="600 ppm/C", Tolerance_%=5, Value1=5%, Value2=0.063W, Value_Code=0000, ValueDisplayed=0, AEC Category=Q200, AEC Qualified=?, ComponentLink1Description="Datasheet link", ComponentLink1URL=http://www.panasonic.com/industrial/components/pdf/AOA0000CE1.pdf, CompType=Resistor, EIA_Code=E24, Green_EU RoHS="Passed with Exemption", Green_EU RoHS-2=Passed, Green_Lifecycle=Active, Green_REACh=Passed, LatestRevisionDate=2017-06-12, MountType=SMT, PackageReference=0402, PartNumber=ERJ-2GE0R00X, Published=2008-06-26, Publisher="Texas Instruments", Res_ohm=0, RoHS=Y, SizeArea_mm2=0.5, SizeX_mm=1, SizeY_mm=0.5, SizeZ_mm=0.6, Supplier 1=Digi-Key, Supplier 2=Newark, Supplier 3=Mouser, Supplier Part Number 2=65T8307, Supplier Part Number 3=667-ERJ-2GE0R00X, SymbolVersion=2009-05-29, Technology="Thick Film", U/M=EA, VDC_V=50
  R180: VARIANT=DNP
R18 R19 R20 R21 R22 R23 R27 R28 R29 R30 R31 R32: "RES, 4.70 k, 0.5%, 0.05 W, 0201", Manufacturer="Yageo America", Power_W=0.05, Supplier Part Number 1=RC0201DR-074K7L-ND, TempCo="200 ppm/C", Tolerance_%=0.5, Value1=0.5%, Value2=0.05W, Value_Code=4k70, ValueDisplayed=4.70k, AEC Category=Q200, AEC Grade=N/A, AEC Qualified=N, ComponentLink1Description="Datasheet link", ComponentLink1URL=http://www.yageo.com/documents/recent/PYu-RC_Group_51_RoHS_L_5.pdf, CompType=Resistor, EIA_Code=E192, LatestRevisionDate=2017-04-07, MountType=SMT, PackageReference=0201, PartNumber=RC0201DR-074K7L, Published=2016-10-14, Publisher="Texas Instruments", Res_ohm=4700, RoHS=Y, SizeArea_mm2=0.18, SizeX_mm=0.6, SizeY_mm=0.3, SizeZ_mm=0.26, Supplier 1=Digi-Key, Supplier 2=Mouser, Supplier Part Number 2=603-RC0201DR-074K7L, SymbolVersion=2009-05-29, Technology="Thick Film", U/M=EA, VDC_V=25
R33: "RES, 20.0, 0.1%, 0.1 W, 0603", Manufacturer="Yageo America", Power_W=0.1, TempCo="25 ppm/C", Value1=0.1%, Value2=0.1W, Value_Code=20R0, ValueDisplayed=20.0, AEC Category=Q200, AEC Qualified=?, ComponentLink1Description="Datasheet link", ComponentLink1URL=http://www.yageo.com/pdf/PYu-RT_1-to-0.05_RoHS_L_3.pdf, CompType=Resistor, EIA_Code=E192, Green_EU RoHS="Passed with Exemption", Green_EU RoHS-2=Passed, Green_Lifecycle=Active, Green_REACh=Passed, LatestRevisionDate=2017-06-13, MountType=SMT, PackageReference=0603, PartNumber=RT0603BRD0720RL, Published=2008-06-26, Publisher="Texas Instruments", Res_ohm=20, RoHS=Y, SizeArea_mm2=1.28, SizeX_mm=1.6, SizeY_mm=0.8, SizeZ_mm=1, SymbolVersion=2009-05-29, Technology="Thin Film", Tolerance_%=0.1, U/M=EA, VDC_V=75
R34: library part CMP-0025885-5, "RES, 0, 5%, 0.1 W, 0603", Manufacturer=Yageo, Power_W=100mW, Supplier Part Number 1=311-0.0GRCT-ND, TempCo="200 ppm/C", Tolerance_%=5%, Value2=0.1W, Value_Code=0000, ValueDisplayed=0, AEC Category=Q200, AEC Grade=N/A, AEC Qualified=N, ComponentLink1Description="Datasheet link", ComponentLink1URL=http://www.yageo.com/pdf/Pu-RC0603_51_PbFree_L_2.pdf, CompType=Resistor, EIA_Code=E24, MountType=SMT, PackageReference=0603, PartNumber=RC0603JR-070RL, Res_ohm=0, RoHS=Y, SizeArea_mm2=1.28, SizeAreaWB_mm2=4.68, SizeX_mm=1.6, SizeY_mm=0.8, SizeZ_mm=1, Supplier 1=Digi-Key, Supplier 2=Mouser, Supplier 3=Farnell, Supplier Part Number 2=603-RC0603JR-070RL, Supplier Part Number 3=9233130, Technology="Thick Film", Value1=5%, VDC_V=75V
R35: library part CMP-0025700-4, "RES, 100, 5%, 0.1 W, AEC-Q200 Grade 0, 0603", Manufacturer=Vishay-Dale, Power_W=100mW, Supplier Part Number 1=541-100GCT-ND, TempCo="200 ppm/C", Tolerance_%=5%, Value2=0.1W, Value_Code=100R, ValueDisplayed=100, AEC Category=Q200, AEC Grade=0, AEC Qualified=Y, ComponentLink1Description="Datasheet link", ComponentLink1URL=http://www.vishay.com/docs/20035/dcrcwe3.pdf, CompType=Resistor, EIA_Code=E24, MountType=SMT, PackageReference=0603, PartNumber=CRCW0603100RJNEA, Res_ohm=100, RoHS=E, SizeArea_mm2=1.28, SizeX_mm=1.6, SizeY_mm=0.8, SizeZ_mm=1, Supplier 1=Digi-Key, Supplier 2=Newark, Supplier 3=Mouser, Supplier Part Number 2=59M6764, Supplier Part Number 3=71-CRCW0603J-100-E3, Technology="Thick Film", Value1=5%, VDC_V=75V
R36: "RES, 33 k, 5%, 0.1 W, 0603", Manufacturer="Yageo America", Power_W=0.1, Supplier Part Number 1=311-33KGRCT-ND, TempCo="100 ppm/C", Tolerance_%=5, Value1=5%, Value2=0.1W, Value_Code=33k0, ValueDisplayed=33k, AEC Category=Q200, AEC Qualified=?, ComponentLink1Description="Datasheet link", ComponentLink1URL=http://www.yageo.com/pdf/Pu-RC0603_51_PbFree_L_2.pdf, CompType=Resistor, EIA_Code=E24, LatestRevisionDate=2017-06-13, MountType=SMT, PackageReference=0603, PartNumber=RC0603JR-0733KL, Published=2008-06-26, Publisher="Texas Instruments", Res_ohm=33000, RoHS=Y, SizeArea_mm2=1.28, SizeX_mm=1.6, SizeY_mm=0.8, SizeZ_mm=1, Supplier 1=Digi-Key, Supplier 2=Mouser, Supplier 3=Farnell, Supplier Part Number 2=603-RC0603JR-0733KL, Supplier Part Number 3=9233563, SymbolVersion=2009-05-29, Technology="Thick Film", U/M=EA, VDC_V=50
R37 R44: library part CMP-0082530-1, "RES, 100 k, 5%, 0.1 W, 0603", Manufacturer=Vishay-Dale, Power_W=100mW, Supplier Part Number 1=541-3992-1-ND, TempCo="200 ppm/C", Tolerance_%=5%, Value2=0.1W, Value_Code=100k, AEC Category=Q200, AEC Grade=N/A, AEC Qualified=N, ComponentLink1Description="Datasheet link", ComponentLink1URL=http://www.vishay.com/docs/28773/crcwce3.pdf, CompType=Resistor, EIA_Code=E24, MountType=SMT, PackageReference=0603, PartNumber=CRCW0603100KJNEAC, Res_ohm=100k, RoHS=E, SizeArea_mm2=1.28, SizeAreaWB_mm2=4.68, SizeX_mm=1.6, SizeY_mm=0.8, SizeZ_mm=1, Supplier 1=Digi-Key, Supplier 2=Mouser, Supplier Part Number 2=71-CRCW0603100KJNEAC, Technology="Thick Film", Value1=5%, ValueDisplayed=100k, VDC_V=75V
R39: "RES, 68.0 k, 1%, 0.1 W, 0603", Manufacturer="Yageo America", Power_W=0.1, Supplier Part Number 1=311-68.0KHRCT-ND, TempCo="200 ppm/C", Tolerance_%=1, Value1=1%, Value2=0.1W, Value_Code=68k0, ValueDisplayed=68.0k, AEC Category=Q200, AEC Qualified=?, ComponentLink1Description="Datasheet link", ComponentLink1URL=http://www.yageo.com/pdf/Pu-RC0603_51_PbFree_L_2.pdf, CompType=Resistor, Green_EU RoHS="Passed with Exemption", Green_EU RoHS-2=Passed, Green_Lifecycle=Active, Green_REACh=Passed, LatestRevisionDate=2017-06-13, MountType=SMT, PackageReference=0603, PartNumber=RC0603FR-0768KL, Published=2008-06-26, Publisher="Texas Instruments", Res_ohm=68000, RoHS=Y, SizeArea_mm2=1.28, SizeX_mm=1.6, SizeY_mm=0.8, SizeZ_mm=1, Supplier 1=Digi-Key, Supplier 2=Mouser, Supplier 3=Farnell, Supplier Part Number 2=603-RC0603FR-0768KL, Supplier Part Number 3=9238700, SymbolVersion=2009-05-29, Technology="Thick Film", U/M=EA, VDC_V=150
R41: library part CMP-0016223-3, "RES, 50m, 1%, 0.75 W, AEC-Q200 Grade 0, 2010", Manufacturer=panasonic, Power_W=750mW, Supplier Part Number 1=P50NCTR-ND, TempCo="100 ppm/C", Tolerance_%=1%, Value2=0.75W, Value_Code=11R0, ValueDisplayed=0.05, AEC Category=Q200, AEC Grade=0, AEC Qualified=Y, ComponentLink1Description="Datasheet link", ComponentLink1URL=http://www.vishay.com/docs/20035/dcrcwe3.pdf, CompType=Resistor, EIA_Code=E96, MountType=SMT, PackageReference=2010, PartNumber=ERJ-L1DKF50MU, Res_ohm=11, RoHS=E, SizeArea_mm2=12.5, SizeX_mm=5, SizeY_mm=2.5, SizeZ_mm=1.66, Supplier 1=Digi-Key, Technology="Thick Film", Value1=1%, VDC_V=400V
R42: "RES, 298 k, 0.1%, 0.1 W, 0603", Manufacturer="Yageo America", Power_W=0.1, TempCo="25 ppm/C", Value1=0.1%, Value2=0.1W, Value_Code=298k, AEC Category=Q200, AEC Qualified=?, ComponentLink1Description="Datasheet link", ComponentLink1URL=http://www.yageo.com/pdf/PYu-RT_1-to-0.05_RoHS_L_3.pdf, CompType=Resistor, EIA_Code=E192, LatestRevisionDate=2017-06-13, MountType=SMT, PackageReference=0603, PartNumber=RT0603BRD07298KL, Published=2008-06-26, Publisher="Texas Instruments", Res_ohm=298000, RoHS=Y, SizeArea_mm2=1.28, SizeX_mm=1.6, SizeY_mm=0.8, SizeZ_mm=1, SymbolVersion=2009-05-29, Technology="Thin Film", Tolerance_%=0.1, U/M=EA, ValueDisplayed=298k, VDC_V=75
R45: "RES, 4.75 k, 0.1%, 0.1 W, 0603", Manufacturer="Susumu Co Ltd", Power_W=0.1, Supplier Part Number 1=RG16P4.75KBCT-ND, TempCo="25 ppm/C", Value1=0.1%, Value2=0.1W, Value_Code=4k75, ValueDisplayed=4.75k, AEC Category=Q200, AEC Qualified=?, ComponentLink1Description="Datasheet link", ComponentLink1URL=http://www.susumu.co.jp/english/pdf/products-j01-01.pdf, CompType=Resistor, EIA_Code=E192, LatestRevisionDate=2017-06-13, MountType=SMT, PackageReference=0603, PartNumber=RG1608P-4751-B-T5, Published=2008-06-26, Publisher="Texas Instruments", Res_ohm=4750, RoHS=Y, SizeArea_mm2=1.28, SizeX_mm=1.6, SizeY_mm=0.8, SizeZ_mm=1, Supplier 1=Digi-Key, Supplier 2=Mouser, Supplier 3=Farnell, Supplier Part Number 2=754-RG1608P-4751-BT5, Supplier Part Number 3=1797196, SymbolVersion=2009-05-29, Technology="Metal Film", Tolerance_%=0.1, U/M=EA, VDC_V=75
R46 R53 R62 R66 R91 R108 R124: "RES, 100 k, 5%, 0.063 W, 0402", Manufacturer=Vishay-Dale, Power_W=0.063, Supplier Part Number 1=541-100KJCT-ND, TempCo="200 ppm/C", Tolerance_%=5, Value1=5%, Value2=0.063W, Value_Code=100k, AEC Category=Q200, AEC Qualified=?, ComponentLink1Description="Datasheet link", ComponentLink1URL=http://www.vishay.com/docs/20035/dcrcwe3.pdf, CompType=Resistor, EIA_Code=E24, Green_EU RoHS="Passed with Exemption", Green_EU RoHS-2=Passed, Green_Lifecycle=Active, Green_REACh=Passed, LatestRevisionDate=2017-06-12, MountType=SMT, PackageReference=0402, PartNumber=CRCW0402100KJNED, Published=2008-06-26, Publisher="Texas Instruments", Res_ohm=100000, RoHS=Y, SizeArea_mm2=0.5, SizeX_mm=1, SizeY_mm=0.5, SizeZ_mm=0.6, Supplier 1=Digi-Key, Supplier 2=Newark, Supplier 3=Mouser, Supplier Part Number 2=59M6699, Supplier Part Number 3=71-CRCW0402J-100K-E3, SymbolVersion=2009-05-29, Technology="Thick Film", U/M=EA, ValueDisplayed=100k, VDC_V=50